# EAGLE board can_adapter (EAGLE 9.4.2)
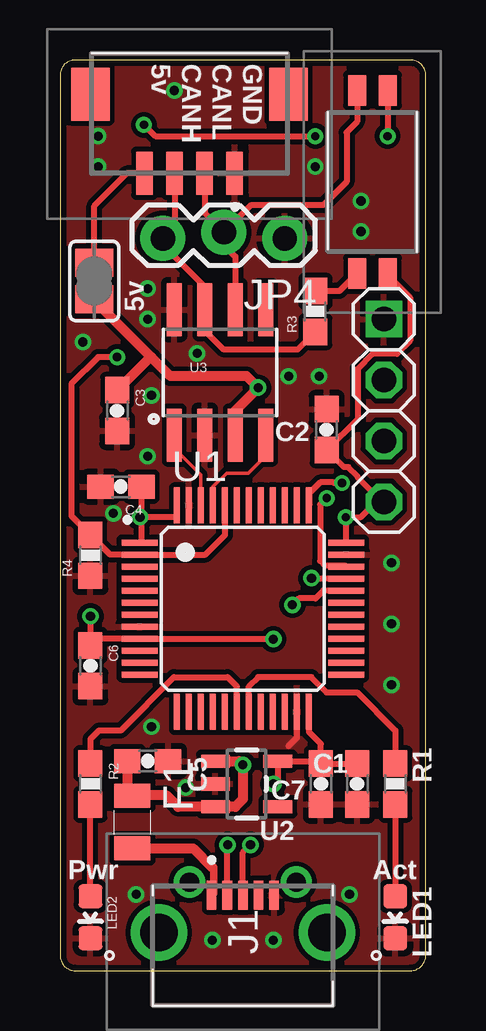
[diagram p0: board, top side]
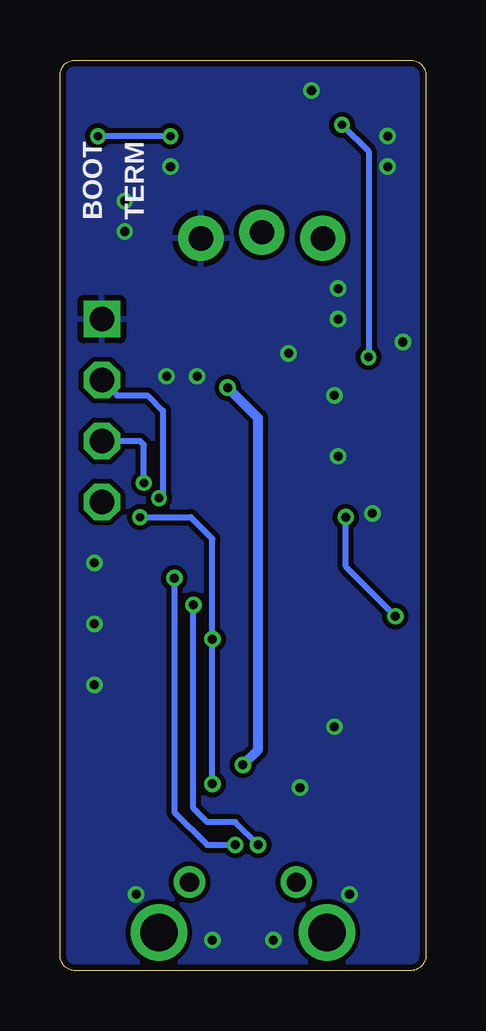
[diagram p1: board, bottom side, seen from below]

Size 15.24 x 37.94 mm. Coordinates in mm from the lower left corner, seen from the top.
Outline: 0,37.31 0,0.64 arc90 0.64,0 14.61,0 arc90 15.24,0.64 15.24,37.31 arc90 14.61,37.94 0.64,37.94 arc90 0,37.31
Copper layers (1*16): Top 0.035mm / dielectric 1.5mm / Bottom 0.035mm
Design rules "Elecrow_2-layer_eagle_rule *": minimum track width 6mil, minimum drill 12mil, track to track 8mil, track to pad 8mil, pad to pad 8mil, via to via 8mil, smd to smd 0mil, copper to edge 10mil, drill to drill 10mil, minimum pad ring 10mil, minimum via ring 6mil, stop-mask expansion 2mil, vias tented up to drill 100mil, thermal gap 10mil

## Footprints (pad centres in the part's own frame; a part is rotated, then mirrored left to right if it is on the bottom)
0603-CAP = smd 1.1 x 1: 1 -0.85,0; 2 0.85,0
PTC0805 = smd 1 x 1.5: 1 -1.1,0; 2 1.1,0
UJ2MIBH24SMTTR = smd 1.2 x 0.4: 1 2.025,1.3; 2 2.025,0.65; 3 2.025,0; 4 2.025,-0.65; 5 2.025,-1.3 | drill 0.8 pad 1.2: MH1 2.575,2.225; MH2 2.575,-2.225 | drill 1.565 pad 2.348: MH3 0.475,-3.5; MH4 0.475,3.5
DF13A4P125H21 = smd 0.7 x 1.8: 1 1.875,-2.5; 2 0.625,-2.5; 3 -0.625,-2.5; 4 -1.875,-2.5 | smd 1.6 x 2.2: MP1 -4.125,0.8; MP2 4.125,0.8
1X04-S = drill 1.016 square: 1 -3.81,0 | drill 1.016 octagon: 2 -1.27,0; 3 1.27,0; 4 3.81,0
1X03_LOCK = drill 1.016 pad 1.88: 1 0,0.127; 2 2.54,-0.127; 3 5.08,0.127
LED-0603 = smd 1 x 1: A 0,-0.877; C 0,0.877
0603-RES = smd 1.1 x 1: 1 -0.85,0; 2 0.85,0
2182LPSTRF = smd 0.76 x 1.27: 1 -0.635,-3.81; 2 0.635,-3.81; 3 0.635,3.81; 4 -0.635,3.81
SJ = smd 1.168 x 1.6: 1 -0.762,0; 2 0.762,0
LQFP48 = smd 1.5 x 0.25: 1 -4.3,2.75; 2 -4.3,2.25; 3 -4.3,1.75; 4 -4.3,1.25; 5 -4.3,0.75; 6 -4.3,0.25; 7 -4.3,-0.25; 8 -4.3,-0.75; 9 -4.3,-1.25; 10 -4.3,-1.75; 11 -4.3,-2.25; 12 -4.3,-2.75; 25 4.3,-2.75; 26 4.3,-2.25; 27 4.3,-1.75; 28 4.3,-1.25; 29 4.3,-0.75; 30 4.3,-0.25; 31 4.3,0.25; 32 4.3,0.75; 33 4.3,1.25; 34 4.3,1.75; 35 4.3,2.25; 36 4.3,2.75 | smd 0.25 x 1.5: 13 -2.75,-4.3; 14 -2.25,-4.3; 15 -1.75,-4.3; 16 -1.25,-4.3; 17 -0.75,-4.3; 18 -0.25,-4.3; 19 0.25,-4.3; 20 0.75,-4.3; 21 1.25,-4.3; 22 1.75,-4.3; 23 2.25,-4.3; 24 2.75,-4.3; 37 2.75,4.3; 38 2.25,4.3; 39 1.75,4.3; 40 1.25,4.3; 41 0.75,4.3; 42 0.25,4.3; 43 -0.25,4.3; 44 -0.75,4.3; 45 -1.25,4.3; 46 -1.75,4.3; 47 -2.25,4.3; 48 -2.75,4.3
SOT23-5 = smd 0.55 x 1.2: 1 -0.95,-1.3; 2 0,-1.3; 3 0.95,-1.3; 4 0.95,1.3; 5 -0.95,1.3
SO08 = smd 0.61 x 2.21: 1 -1.905,-2.616; 2 -0.635,-2.616; 3 0.635,-2.616; 4 1.905,-2.616; 5 1.905,2.616; 6 0.635,2.616; 7 -0.635,2.616; 8 -1.905,2.616

## Placement (x,y rotation side)
C1  0.1uF  [0603-CAP]  12.38,7.78 270 top
C2  0.1uF  [0603-CAP]  11.11,22.54 90 top
C3  0.1uF  [0603-CAP]  2.38,23.34 270 top
C4  0.1uF  [0603-CAP]  2.54,20.16 180 top
C5  4.7uF  [0603-CAP]  3.65,8.73 180 top
C6  0.1uF  [0603-CAP]  1.27,12.7 270 top
C7  4.7uF  [0603-CAP]  10.87,7.78 270 top
F1  [PTC0805]  3.02,6.19 270 top
J1  UJ2-MIBH2-4-SMT-TR  [UJ2MIBH24SMTTR]  7.62,1.11 90 top
J5  DF13A-4P-1.25H(21)  [DF13A4P125H21]  5.4,35.72 0 top
JP1  [1X04-S]  13.49,23.34 270 top
JP4  [1X03_LOCK]  9.37,30.64 180 top
LED1  BLUE  [LED-0603]  13.97,2.22 180 top
LED2  GREEN  [LED-0603]  1.27,2.22 180 top
R1  1k  [0603-RES]  13.97,7.78 270 top
R2  1k  [0603-RES]  1.27,7.78 270 top
R3  120  [0603-RES]  10.64,27.46 90 top
R4  10k  [0603-RES]  1.27,17.3 90 top
S1  218-2LPSTRF  [2182LPSTRF]  13.02,32.86 0 top
SJ1  [SJ]  1.43,28.73 90 top
U1  STM32F042C6T6  [LQFP48]  7.62,15.08 0 top
U2  AP2202K-3.3TRG1  [SOT23-5]  7.78,7.78 270 top
U3  MCP2551  [SO08]  6.67,24.92 0 top

## Library data of the parts
C1-C7 R1-R4 = SparkFun-Passives
F1 = dp_devices
J1 = SamacSys_Parts; ARROW_PART_NUMBER: UJ2-MIBH2-4-SMT-TR; ARROW_PRICE-STOCK: https://www.arrow.com/en/products/uj2-mibh2-4-smt-tr/cui-devices; DESCRIPTION: CONN RCPT USB2.0 MICRO B SMD R/A; HEIGHT: 2.5mm; MANUFACTURER_NAME: CUI Devices; MANUFACTURER_PART_NUMBER: UJ2-MIBH2-4-SMT-TR; MOUSER_PART_NUMBER: 490-UJ2-MIBH2-4-SMT; MOUSER_PRICE-STOCK: https://www.mouser.co.uk/ProductDetail/CUI-Devices/UJ2-MIBH2-4-SMT-TR?qs=5mqXD9RfOg1yxHIpPvPxvQ%3D%3D
J5 = SamacSys_Parts; DESCRIPTION: Headers & Wire Housings 4P SNG ROW PIN HDR R/A SMT; HEIGHT: 3.6mm; MANUFACTURER_NAME: Hirose; MANUFACTURER_PART_NUMBER: DF13A-4P-1.25H(21); MOUSER_PART_NUMBER: 798-DF13A4P125H21; MOUSER_PRICE-STOCK: https://www.mouser.com/Search/Refine.aspx?Keyword=798-DF13A4P125H21; RS_PART_NUMBER: 1886349; RS_PRICE-STOCK: http://uk.rs-online.com/web/p/products/1886349
JP1 = pinhead-2
JP4 = SparkFun-Connectors
LED1 LED2 = SparkFun-LED
S1 = SamacSys_Parts; DESCRIPTION: SWITCH SLIDE DIP SPST 25MA 24V; HEIGHT: 2.65mm; MANUFACTURER_NAME: CTS; MANUFACTURER_PART_NUMBER: 218-2LPSTRF; MOUSER_PART_NUMBER: 774-218-2LPSTRF; MOUSER_PRICE-STOCK: https://www.mouser.co.uk/ProductDetail/CTS-Electronic-Components/218-2LPSTRF?qs=6E8igxPflKfid29mp1Rq8Q%3D%3D
SJ1 = jumper
U1 = Protofusion
U2 = SparkFun-PowerIC; PROD_ID: VREG-00822
U3 = SparkFun-DigitalIC; PROD_ID: IC-09907

## Nets
3.3V: C1.1 C2.1 C4.1 C6.1 C7.1 JP1.4 S1.2 U1.1 U1.9 U1.24 U1.36 U1.48 U2.5
BOOT0: R4.2 S1.3 U1.2 U1.44
CAN_RX: U1.45 U3.4
CAN_TX: U1.46 U3.1
CANH: J5.3 JP4.3 R3.1 U3.7
CANL: J5.2 JP4.2 S1.4 U3.6
D+: J1.3 U1.33
D-: J1.2 U1.32
GND: C1.2 C2.2 C3.2 C4.2 C5.1 C6.2 C7.2 J1.5 J5.1 JP1.1 JP4.1 LED1.C LED2.C R4.1 U1.8 U1.23 U1.35 U1.47 U2.2 U3.2 U3.8
LED_RX: R1.1 U1.19
LED_TX: R2.1 U1.18
N$2: LED2.A R2.2
N$3: R3.2 S1.1
N$5: J5.4 SJ1.2
N$7: F1.2 J1.1
N$23: LED1.A R1.2
SWCLK: JP1.3 U1.37
SWDIO: JP1.2 U1.34
V_BATT: C3.1 C5.2 F1.1 SJ1.1 U2.1 U2.3 U3.3

## Tracks (layer width: path | path; a pad name or v marks a point on that pad's centre or on a via)
3.3V  (via drill 0.35, 0.38)
  Top 0.254: v8.89,7.78 9.08,7.97 U2.5 10.77,8.73 C7.1 | v1.27,14.76 C6.1 1.55,13.83 U1.9 8.87,13.83 v8.89,13.81 | C4.1 3.39,18.89 | 3.39,18.89 3.39,17.9 U1.1 | U1.48 4.87,18.94 4.82,18.89 v3.33,18.89 3.39,18.89 | U1.24 10.37,9.95 10.87,9.45 C7.1 | C7.1 C1.1 | U1.36 11.92,18.88 v11.91,18.89 12.54,18.89 13.18,19.53 JP1.4 13.44,19.53 12.4,20.56 12.4,20.59 12.02,20.98 11.83,20.98 C2.1 12.4,22.98 12.4,25.06 13.04,25.7 14.04,25.7 14.59,26.25 14.59,28.05 13.65,28.98 S1.2
  Bottom 0.254: v1.27,14.76 3.33,16.83 v3.33,18.89 | v8.89,7.78 v8.89,13.81 8.89,17.99 9.79,18.89 v11.91,18.89
BOOT0  (via drill 0.35)
  Top 0.254: U1.44 6.87,18.14 6.06,17.33 U1.2 2.09,17.33 R4.2 0.48,18.95 0.48,24.45 1.59,25.56 v2.38,25.56 | v3.49,35.24 3.97,34.77 v10.64,34.77 | S1.3 v13.65,34.77
  Bottom 0.254: v3.49,35.24 2.38,34.13 v2.38,25.56 | v10.64,34.77 v13.65,34.77
CAN_RX
  Top 0.152: U3.4 8.57,21.46 7.85,20.73 6.95,20.73 6.37,20.15 U1.45
CAN_TX
  Top 0.152: U3.1 4.76,21.77 5.87,20.67 U1.46
CANH
  Top 0.254: J5.3 4.77,31 JP4.3 4.29,30.24 6.03,28.5 U3.7 6.03,26.67 6.83,25.88 9.9,25.88 R3.1
CANL
  Top 0.254: U3.6 7.3,29.75 6.83,30.22 JP4.2 | JP4.2 7.97,31.91 10.98,31.91 11.94,32.86 11.94,34.93 12.38,35.37 S1.4 | J5.2 6.02,31.57 JP4.2
D+  (via drill 0.38)
  Top 0.254: U1.33 10.5,16.33 v10.48,16.35 | J1.3 7.62,4.92 v7.94,5.24
  Bottom 0.254: v10.48,16.35 10.48,6.6 9.11,5.24 v7.94,5.24
D-  (via drill 0.38)
  Top 0.254: U1.32 10.97,15.83 10.65,15.51 9.96,15.51 v9.68,15.24 | J1.2 6.97,5.22 v6.99,5.24
  Bottom 0.254: v9.68,15.24 9.68,6.76 9.11,6.19 7.94,6.19 v6.99,5.24
GND  (via drill 0.38)
  Top 0.254: U1.23 9.87,9.71 9.53,9.37
  other vias: 12.06,3.18 3.17,3.18 9.53,24.76 2.22,19.05 3.81,10.16 5.24,7.62 1.59,33.5 1.59,34.77 12.54,32.07 12.54,30.8 13.81,16.99 10.64,33.5 10.79,24.76 13.81,14.45 13.81,11.91 3.81,23.97 5.71,25.72 8.89,1.27 6.35,1.27 4.76,36.67 3.65,27.15 3.65,28.42 0.95,26.19 3.65,21.43
  pour Bottom: -1.91,42.39 19.68,42.39 19.68,-2.06 -1.91,-2.06
  pour Top: -3.17,-2.06 20.95,-1.59 20.95,43.02 -3.17,43.02
LED_RX
  Top 0.254: U1.19 7.87,11.84 8.26,12.22 10.48,12.22 11.11,11.59 12.38,11.59 13.97,10 R1.1
LED_TX
  Top 0.254: U1.18 7.37,11.84 6.99,12.22 4.75,12.22 2.53,10 1.62,10 1.27,9.65 R2.1
N$1
  cutout Top: 4.45,27.78 5.08,27.78 5.08,28.42 4.45,28.42
N$2
  Top 0.254: LED2.A R2.2
N$3
  Top 0.254: S1.1 11.64,28.31 R3.2
N$5
  Top 0.254: SJ1.2 1.43,31.86 2.79,33.22 J5.4
N$7
  Top 0.305: 6.35,4.29 6.41,4.23 6.41,3.22 J1.1
  Top 0.406: F1.2 5.54,5.09 6.35,4.29
N$23
  Top 0.254: R1.2 LED1.A
SWCLK  (via drill 0.35)
  Top 0.254: v11.75,20.32 11.41,20.32 11.38,20.34 10.84,20.34 10.38,19.89 10.38,19.39 U1.37
  Bottom 0.254: v11.75,20.32 11.75,21.91 11.91,22.07 JP1.3
SWDIO  (via drill 0.35)
  Top 0.254: U1.34 11.88,16.88 11.03,16.88 10.84,17.07 10.84,19.41 v11.11,19.69
  Bottom 0.254: v11.11,19.69 10.95,19.84 10.95,23.34 11.59,23.97 12.86,23.97 JP1.2
V_BATT  (via drill 0.38)
  Top 0.254: U2.3
  Top 0.406: U3.3 7.3,23.34 v8.26,24.29 7.78,24.77 4.6,24.77 3.81,25.56 | C5.2 2.8,7.51 F1.1 3.03,7.3 4.45,7.3 4.92,6.83 U2.3 7.3,6.83 7.62,7.14 v7.62,8.57 7.46,8.73 U2.1 | SJ1.1 1.43,27.94 3.81,25.56 | C3.1 3.75,25.56 3.81,25.56
  Bottom 0.406: v8.26,24.29 6.99,23.02 6.99,9.21 v7.62,8.57

## Text on the board
tPlace: 5v | CANH | CANL | GND | 5v | Pwr | Act
bPlace: TERM | BOOT